# EAGLE board pwd.keep--2 (EAGLE 6.5.0)
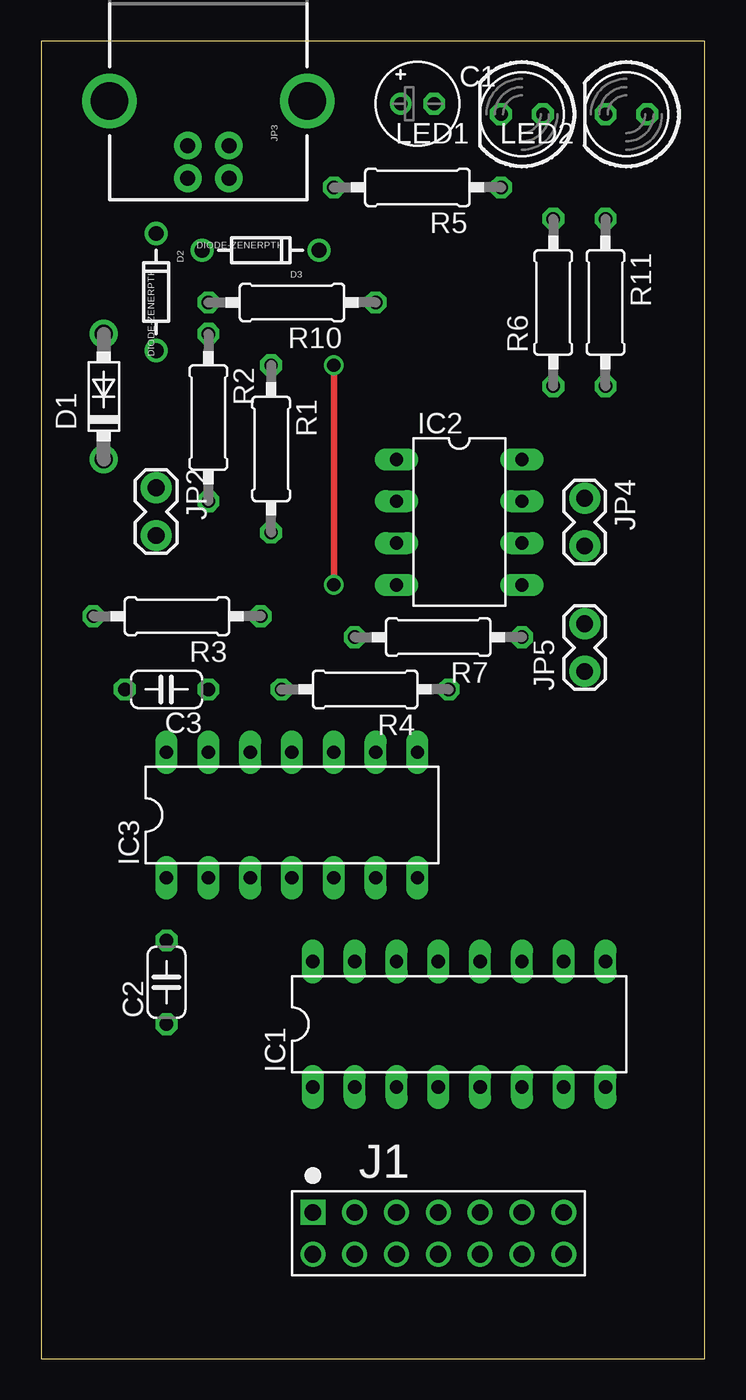
[diagram p0: board, top side]
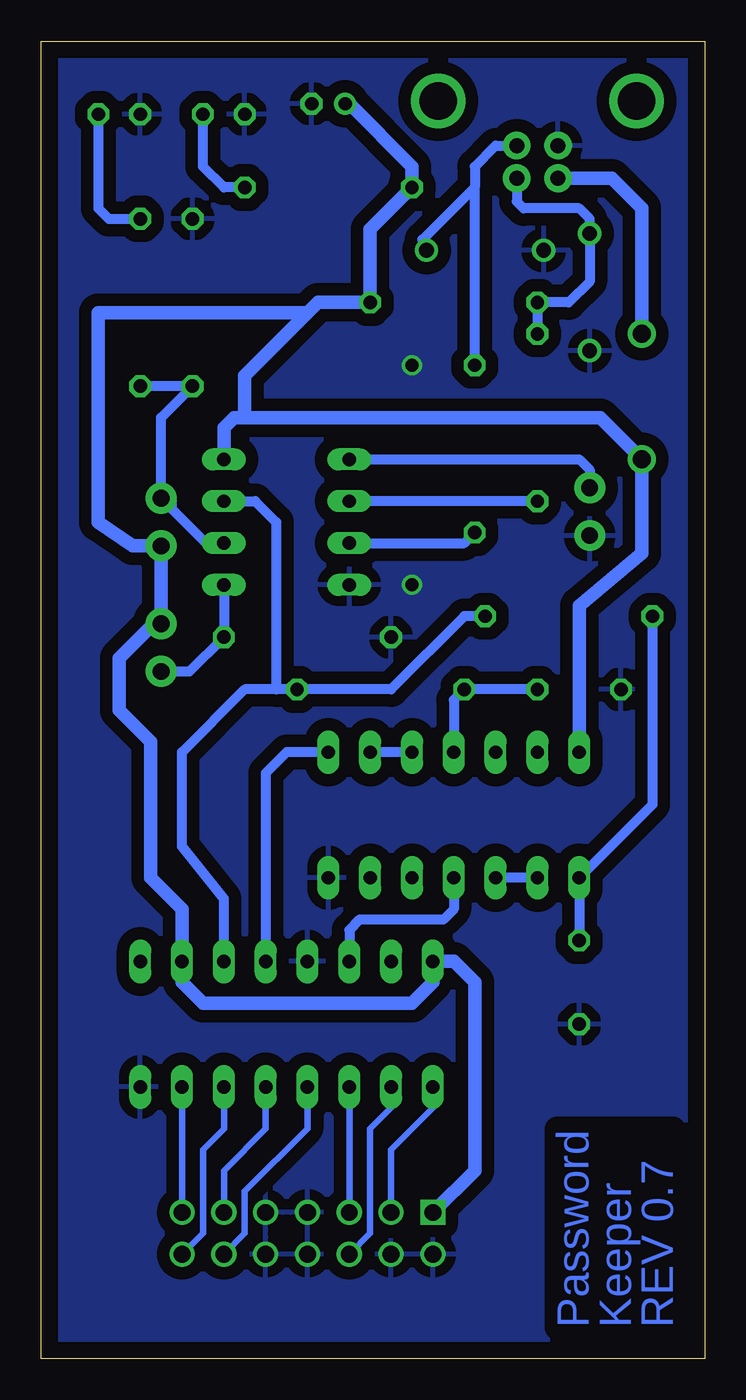
[diagram p1: board, bottom side, seen from below]

Size 40.31 x 80 mm. Coordinates in mm from the lower left corner, seen from the top.
Outline: 0,0 40.31,0 40.31,80 0,80 0,0
Copper layers (1*16): Top 0.035mm / dielectric 1.5mm / Bottom 0.035mm
Design rules "default *": minimum track width 10mil, minimum drill 24mil, track to track 30mil, track to pad 30mil, pad to pad 30mil, via to via 30mil, smd to smd 8mil, copper to edge 40mil, drill to drill 8mil, minimum pad ring 10mil, minimum via ring 8mil, stop-mask expansion 4mil, vias tented up to drill 0mil, thermal gap 25mil

## Footprints (pad centres in the part's own frame; a part is rotated, then mirrored left to right if it is on the bottom)
E2-5 = drill 0.813 pad 1.27: + -1.016,0 | drill 0.813 pad 1.27 octagon: - 1.016,0
C050-024X044 = drill 0.813 octagon: 1 -2.54,0; 2 2.54,0
DO41-7.6 = drill 1.1 pad 1.7: A 3.81,0; C -3.81,0
DIODE-ZENER = drill 0.9: P$1 -3.556,0; P$2 3.556,0
DIL16 = drill 0.813 long: 1 -8.89,-3.81; 2 -6.35,-3.81; 3 -3.81,-3.81; 4 -1.27,-3.81; 5 1.27,-3.81; 6 3.81,-3.81; 7 6.35,-3.81; 8 8.89,-3.81; 9 8.89,3.81; 10 6.35,3.81; 11 3.81,3.81; 12 1.27,3.81; 13 -1.27,3.81; 14 -3.81,3.81; 15 -6.35,3.81; 16 -8.89,3.81
DIL08 = drill 0.813 long: 1 -3.81,-3.81; 2 -1.27,-3.81; 3 1.27,-3.81; 4 3.81,-3.81; 5 3.81,3.81; 6 1.27,3.81; 7 -1.27,3.81; 8 -3.81,3.81
DIL14 = drill 0.813 long: 1 -7.62,-3.81; 2 -5.08,-3.81; 3 -2.54,-3.81; 4 0,-3.81; 5 2.54,-3.81; 6 5.08,-3.81; 7 7.62,-3.81; 8 7.62,3.81; 9 5.08,3.81; 10 2.54,3.81; 11 0,3.81; 12 -2.54,3.81; 13 -5.08,3.81; 14 -7.62,3.81
SAMTEC_SDL-107-TT-12 = drill 1.016 square: 1 -15.24,2.54 | drill 1.016: 2 -15.24,0; 3 -12.7,2.54; 4 -12.7,0; 5 -10.16,2.54; 6 -10.16,0; 7 -7.62,2.54; 8 -7.62,0; 9 -5.08,2.54; 10 -5.08,0; 11 -2.54,2.54; 12 -2.54,0; 13 0,2.54; 14 0,0
1X02_LOCK = drill 1.016 pad 1.88: 1 -0.178,0; 2 2.718,0
USB-B-PTH = drill 0.914 pad 1.676: D+ 0,1.25; D- 1.981,1.25; GND 0,-1.25; VBUS 1.981,-1.25 | drill 2.286: S1 -2.718,-6.02; S2 -2.718,6.02
LED5MM = drill 0.813 octagon: A -1.27,0; K 1.27,0
0207/10 = drill 0.813 octagon: 1 -5.08,0; 2 5.08,0

## Placement (x,y rotation side)
C1  10uF  [E2-5]  22.86,76.2 0 top
C2  2.2nF  [C050-024X044]  7.62,22.86 90 top
C3  2.2nF  [C050-024X044]  7.62,40.64 180 top
D1  1N5817-B  [DO41-7.6]  3.81,58.42 90 top
D2  DIODE-ZENERPTH  [DIODE-ZENER]  6.99,64.77 270 top
D3  DIODE-ZENERPTH  [DIODE-ZENER]  13.34,67.31 180 top
IC1  74HC595N  [DIL16]  25.4,20.32 0 top
IC2  TINY10P  [DIL08]  25.4,50.8 270 top
IC3  40106N  [DIL14]  15.24,33.02 0 top
J1  SDL-107-TT-12  [SAMTEC_SDL-107-TT-12]  31.75,6.35 0 top
JP2  Reset  [1X02_LOCK]  6.99,52.7 270 top
JP3  USB-B  [USB-B-PTH]  10.16,73.66 270 top
JP4  Button1  [1X02_LOCK]  33.02,52.07 270 top
JP5  Button2  [1X02_LOCK]  33.02,41.91 90 top
LED1  Power  [LED5MM]  29.21,75.56 180 top
LED2  ACT  [LED5MM]  35.56,75.56 180 top
R1  68  [0207/10]  13.97,55.24 270 top
R2  68  [0207/10]  10.16,57.15 270 top
R3  33k  [0207/10]  8.26,45.09 180 top
R4  220k  [0207/10]  19.68,40.64 180 top
R5  560  [0207/10]  22.86,71.12 180 top
R6  10k  [0207/10]  31.11,64.14 90 top
R7  10k  [0207/10]  24.13,43.81 180 top
R10  1.5k  [0207/10]  15.24,64.14 180 top
R11  470  [0207/10]  34.29,64.14 270 top

## Library data of the parts
C1-C3 = rcl
D1 = diode
D2 D3 = SparkFun-DiscreteSemi
IC1 = 74xx-eu
IC2 = atmel; OC_FARNELL: unknown; OC_NEWARK: unknown
IC3 = 40xx
J1 = SAMTEC-BBx-ERx-SLx-SDL_By_element14_Batch_1; MPN: SDL-107-TT-12; OC_FARNELL: 2019227; OC_NEWARK: -; PACKAGE: RECEPTACLE, 2.54MM, THT VERT, 14WAY; SUPPLIER: Samtec
JP2 JP4 JP5 = SparkFun-Connectors
JP3 = SparkFun-Connectors; PROD_ID: CONN-08278
LED1 LED2 = led
R1-R7 R10 R11 = eagle-ltspice; SPICEMODEL: NONE; SPICEPREFIX: R

## Nets
+5V: C1.+ D1.C IC1.10 IC1.16 IC2.8 IC3.14 J1.1 JP4.2 JP5.2 R5.2 R10.1
GND: C1.- C2.1 C3.2 D2.P$2 D3.P$2 IC1.8 IC1.13 IC2.4 IC3.7 J1.2 J1.4 J1.7 J1.8 J1.9 J1.10 JP2.2 JP3.GND LED1.K LED2.K R6.2 R7.2
N$1: IC1.7 J1.13
N$2: IC1.6 J1.14
N$3: IC1.5 J1.11
N$4: IC1.4 J1.12
N$5: IC1.3 J1.5
N$6: IC1.2 J1.6
N$7: IC1.1 J1.3
N$8: D3.P$1 JP3.D+ R1.1
N$9: IC2.3 R1.2
N$10: D2.P$1 JP3.D- R2.1 R10.2
N$11: IC2.2 R2.2
N$12: IC2.1 JP2.1
N$13: LED2.A R11.1
N$14: LED1.A R5.1
N$15: IC1.11 IC2.7 R3.1 R4.1
N$16: C3.1 IC3.11 R4.2
N$17: C2.2 IC3.1 R3.2
N$18: IC2.6 JP4.1 R6.1 R11.2
N$19: IC3.2 IC3.3
N$20: IC2.5 JP5.1 R7.1
N$21: IC1.14 IC3.4
N$22: IC1.12 IC3.8
N$23: IC3.9 IC3.10
VCC: D1.A JP3.VBUS

## Tracks (layer width: path | path; a pad name or v marks a point on that pad's centre or on a via)
+5V
  Bottom 0.61: JP5.2 33.2,44.63 33.34,44.77
  Bottom 0.813: J1.1 13.97,11.43 13.97,22.86 15.24,24.13 IC1.16 16.51,22.86 17.78,21.59 30.48,21.59 31.75,22.86 IC1.10 31.75,27.3 33.66,29.21 33.66,37.47 35.56,39.37 35.56,42.55 33.34,44.77 33.02,45.09 JP4.2 34.75,49.35 36.83,50.8 36.83,63.5 24.13,63.5 | C1.+ 21.59,76.2 17.78,72.39 R5.2 20.32,68.58 R10.1 23.5,64.14 24.13,63.5 | 24.13,63.5 27.94,59.69 27.94,57.15 | 27.94,57.15 6.35,57.15 D1.C 3.81,48.9 7.62,45.72 IC3.14 | 27.94,57.15 28.57,57.15 29.21,56.52 IC2.8
GND  (via drill 0.8 pad 0.41)
  Top 0.406: v17.78,46.99 v17.78,60.33
  pour Bottom: 0,80.01 40.64,80.01 40.64,0 0,0
N$1
  Bottom 0.406: IC1.7 J1.13
N$2
  Bottom 0.406: IC1.6 29.21,13.97 30.48,12.7 30.48,7.62 J1.14
N$3
  Bottom 0.406: IC1.5 26.67,13.97 29.21,11.43 J1.11
N$4
  Bottom 0.406: IC1.4 24.13,13.97 27.94,10.16 27.94,7.62 J1.12
N$5
  Bottom 0.406: IC1.3 J1.5
N$6
  Bottom 0.406: J1.6 20.32,7.62 20.32,13.97 19.05,15.24 IC1.2
N$7
  Bottom 0.406: J1.3 19.05,12.7 16.51,15.24 IC1.1
N$8
  Bottom 0.61: R1.1 13.97,71.12 | JP3.D+ 12.7,73.66 13.97,72.39 13.97,71.12 | 13.97,71.12 17.14,67.94 17.14,67.56 D3.P$1
N$9
  Bottom 0.61: IC2.3 14.61,49.53 R1.2
N$10
  Bottom 0.61: JP3.D- 11.41,70.25 11.01,69.85 7.62,69.85 6.99,69.22 D2.P$1 6.99,65.41 8.26,64.14 R10.2 R2.1
N$11
  Bottom 0.61: R2.2 IC2.2
N$12
  Bottom 0.61: IC2.1 7.62,54.61 6.99,53.98 JP2.1
N$13
  Bottom 0.61: LED2.A 36.83,69.85 36.2,69.22 R11.1
N$14
  Bottom 0.61: R5.1 29.21,71.12 30.48,72.39 LED1.A
N$15
  Bottom 0.61: 26.04,40.64 R4.1 19.05,40.64 14.61,45.09 R3.1 | IC2.7 27.3,52.07 26.04,50.8 26.04,40.64 | IC1.11 29.21,27.94 31.75,31.11 31.75,36.83 27.94,40.64 26.04,40.64
N$16
  Bottom 0.61: C3.1 R4.2 15.24,40.01 IC3.11
N$17
  Bottom 0.61: R3.2 3.17,33.66 IC3.1 C2.2
N$18
  Bottom 0.406: 32.56,52.25 32.38,52.07
  Bottom 0.61: IC2.6 30.3,49.53 32.38,51.61 32.38,52.07 | R11.2 R6.1 33.02,57.15 JP4.1 32.56,52.25
N$19
  Bottom 0.61: IC3.2 IC3.3
N$20
  Bottom 0.61: IC2.5 R7.1 31.29,41.73 JP5.1
N$21
  Bottom 0.61: IC3.4 15.24,27.3 15.88,26.67 20.95,26.67 21.59,26.04 IC1.14
N$22
  Bottom 0.61: IC3.8 25.4,36.83 26.67,35.56 IC1.12
N$23
  Bottom 0.61: IC3.10 IC3.9
VCC
  Bottom 0.813: JP3.VBUS 5.64,71.68 3.81,69.85 D1.A

## Text on the board
Bottom: Password / Keeper / REV 0.7